# Altium PCB GPS track2_ar.PcbDoc (part 1 of 3)
Units mm, origin at the board's own origin, x right, y up, seen from the top; angles counter-clockwise.
Board outline 100 x 80 mm, 2 copper layers (Top Layer, Bottom Layer); 195 components, 113 nets, 611 pads, 306 vias.
Unrouted connection lines stored in the file: 1.
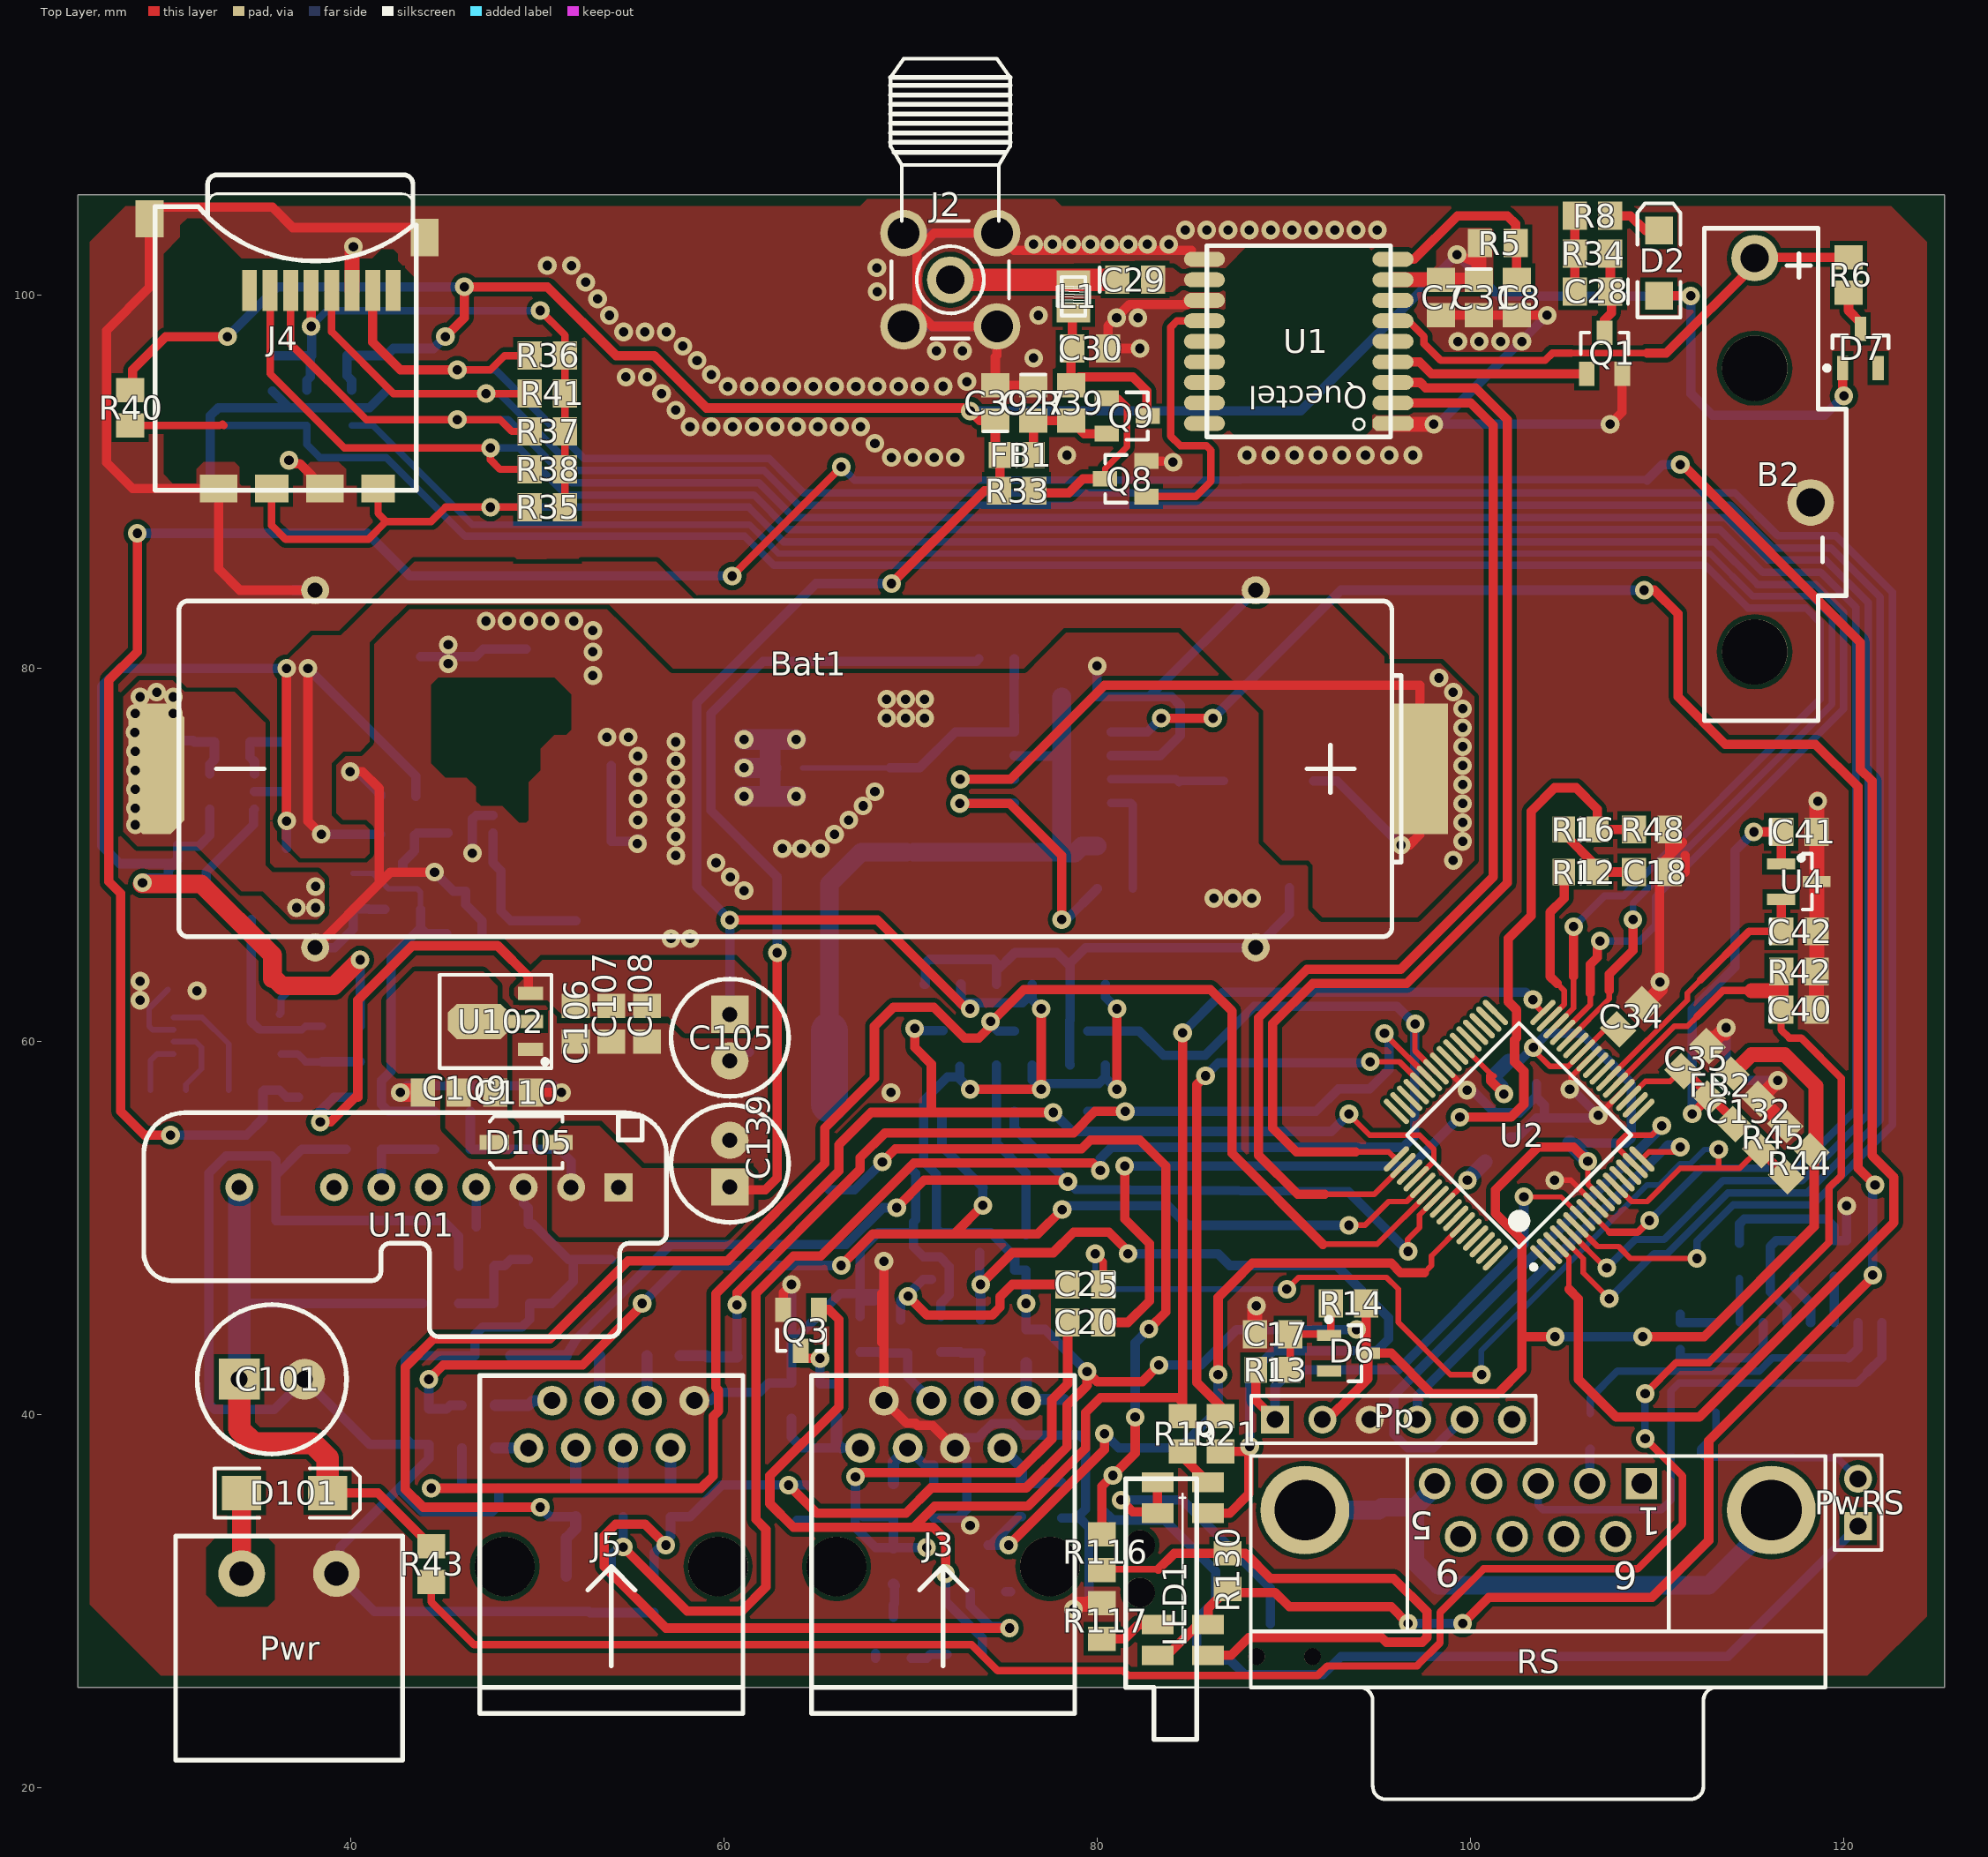
[diagram p0: Top Layer view]
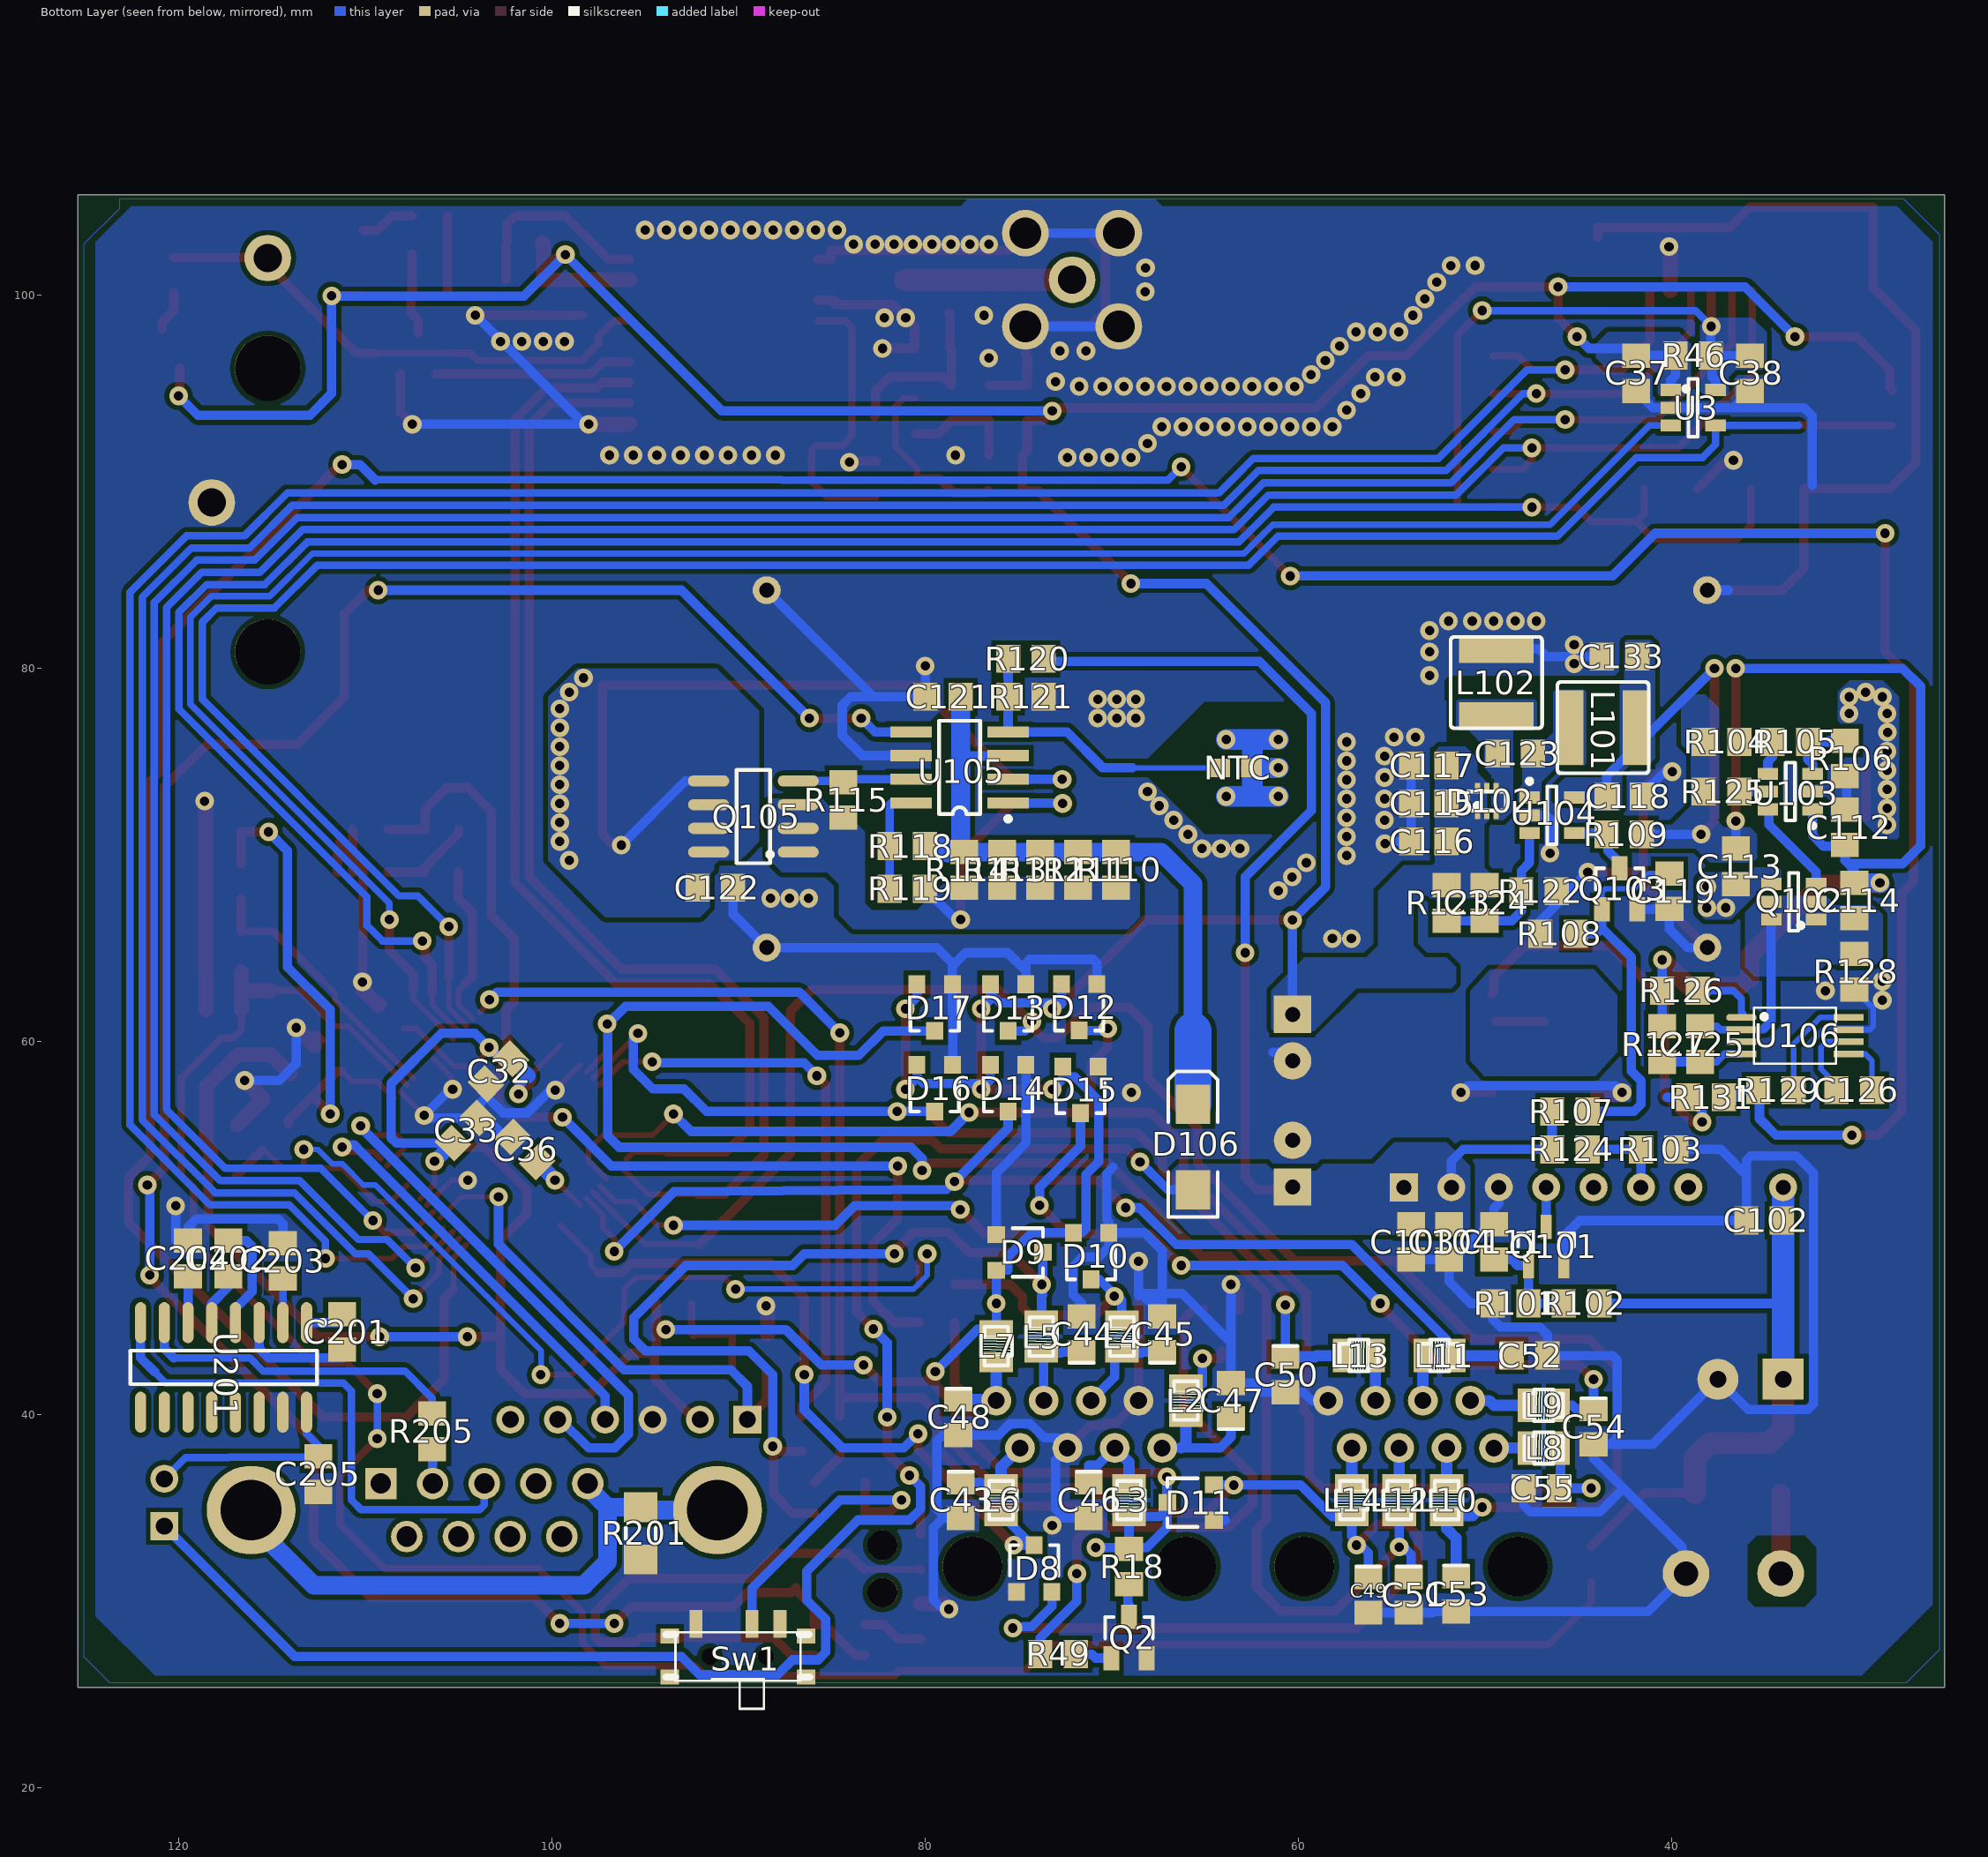
[diagram p1: Bottom Layer view, seen from below]

## Layer stack, top to bottom
Top Layer: signal copper 0.0356
Dielectric: dielectric 0.32, FR-4, Dk 4.8
Bottom Layer: signal copper 0.0356

## Board outline
25.4,25.4 125.4,25.4 125.4,105.4 25.4,105.4

## Design rules (kind name [scope] priority, off if disabled: settings)
Clearance Clearance_1 [All vs (HasFootprint('TQFP-PT64_N'))] p1: gap=0.2
Clearance [All] p2: gap=0.254
ComponentClearance ComponentClearance_1 [All] p1: gap=0.254 collisioncheckmode=3 verticalgap=0.254 showdistances=FALSE
ComponentClearance [All] p2: gap=0.254 collisioncheckmode=3 verticalgap=2540 showdistances=FALSE
FabricationTestPointUsage TestPointUsage [All] p1: valid=0 allowmultiple=FALSE
FabricationTestpoint Testpoint [All] p1: side=3 testpointundercomponent=TRUE minsize=1.016 maxsize=2.54 preferedsize=1.524 minholesize=0 maxholesize=1.016 preferedholesize=0.813 testpointgrid=0.025 allowsidetop=TRUE allowsidebottom=TRUE usegrid=TRUE gridtolerance=0
HoleSize [All] p1: absolutevalues=TRUE maxlimit=5 minlimit=0.254 maxpercent=80.000 minpercent=20.000
MinimumSolderMaskSliver [All] p1: minsoldermaskwidth=0.2
PlaneClearance [All] p1: clearance=0.254
PlaneConnect [All] p1: planeconnectstyle=Direct reliefexpansion=0.508 reliefentries=4 reliefconductorwidth=0.254 reliefairgap=0.254
PolygonConnect [All] p1: connectstyle=Direct reliefconductorwidth=0.254 reliefentries=4 polygonreliefangle="90 Angle"
RoutingVias [All] p1: holewidth=0.5 width=1 viastyle="Through Hole" minholewidth=0.5 minwidth=0.8 maxholewidth=1 maxwidth=1.3
SilkToSilkClearance [All] p1: silktosilkclearance=0.2
SilkscreenOverComponentPads [All] p1: minsilkscreentomaskgap=0.254
SolderMaskExpansion [All] p1: expansion=0.102
Width [All] p1: maxlimit=3 minlimit=0.1 preferedwidth=0.5
19 further rules are at their usual default settings.

## Classes and differential pairs
component class "GPS supply2": Bat1 C101 C102 C103 C104 C105 C106 C107 C108 C109 C110 C111 C112 C113 C114 C115 C116 C117 C118 C119 C121 C122 C123 C124 C125 C126 C132 C133 C139 D101 D102 D105 D106 FB2 L101 L102 NTC Pwr Q101 Q102 Q103 Q105 R101 R102 R103 R104 R105 R106 R107 R108 R109 R110 R111 R112 R113 R114 R115 R116 R117 R118 R119 R120 R121 R122 R123 R124 R125 R126 R127 R128 R129 R130 R131 U101 U102 U103 U104 U105 U106
component class "Tracker RS232_2": C201 C202 C203 C204 C205 PwRS R201 R205 RS U4a U201
component class "GPS track2": B2 C7 C8 C17 C18 C20 C25 C27 C28 C29 C30 C31 C32 C33 C34 C35 C36 C37 C38 C39 C40 C41 C42 C43 C44 C45 C46 C47 C48 C49 C50 C51 C52 C53 C54 C55 D2 D6 D7 D8 D9 D10 D11 D12 D13 D14 D15 D16 D17 FB1 J2 J3 J4 J5 L1 L2 L3 L4 L5 L6 L7 L8 L9 L10 L11 L12 L13 L14 LED1 Pp Q1 Q2 Q3 Q8 Q9 R5 R6 R8 R12 R13 R14 R16 R18 R19 R21 R33 R34 R35 R36 R37 R38 R39 R40 R41 R42 R43 R44 R45 R46 R48 R49 Sw1 U1 U2 U3 U4

## Components (designator, comment, footprint, x,y, rotation, side; value= is the part's Value field where it differs from the comment)
B2 "CR2032 holder" "1065 Keystone" 118.237,88.9 r270 top
Bat1 "LiIon" 18650 63.3,74.625 r180 top locked
C7 "Cap Semi" 2012[0805] 98.425,99.883 r90 top
C8 "Cap Semi" 2012[0805] 102.489,99.883 r90 top
C17 "Cap Semi" 2012[0805] 89.408,44.323 r0 top
C18 "Cap Semi" 2012[0805] 109.728,69.093 r180 top
C20 "Cap Semi" 2012[0805] 79.375,44.958 r0 top
C25 "Cap Semi" C0805 79.375,46.99 r180 top
C27 "Cap Semi" C0805 76.581,94.234 r270 top
C28 "Cap Semi" C0805 106.553,100.203 r180 top
C29 "Cap Semi" C0805 82.042,100.838 r0 top
C30 "Cap Semi" C0805 79.629,97.155 r0 top
C31 "Cap Semi" C0805 100.457,99.883 r270 top
C32 "Cap Semi" 2012[0805] 102.87,58.42 r135 bottom
C33 "Cap Semi" 2012[0805] 104.648,55.245 r315 bottom
C34 "Cap Semi" 2012[0805] 108.585,61.341 r225 top
C35 "" 2012[0805] 112.051,59.092 r225 top
C36 "Cap Semi" 2012[0805] 101.473,54.229 r225 bottom
C37 "Cap Semi" 2012[0805] 41.91,95.824 r90 bottom
C38 "Cap Semi" 2012[0805] 35.814,95.824 r90 bottom
C39 "Cap Semi" C0805 74.549,94.234 r90 top
C40 "Cap Semi" C0805 117.602,61.722 r0 top
C41 "Cap Semi" C0805 117.607,71.247 r0 top
C42 "Cap Semi" C0805 117.607,65.913 r0 top
C43 "Cap Semi" C0805 78.105,35.433 r270 bottom
C44 "Cap Semi" C0805 71.628,44.323 r90 bottom
C45 "Cap Semi" C0805 67.31,44.323 r90 bottom
C46 "Cap Semi" C0805 71.247,35.433 r270 bottom
C47 "Cap Semi" C0805 63.627,40.767 r90 bottom
C48 "Cap Semi" C0805 78.232,39.878 r270 bottom
C49 "Cap Semi" C0805 56.261,30.353 r270 bottom
C50 "Cap Semi" C0805 60.706,42.164 r270 bottom
C51 "Cap Semi" C0805 54.102,30.353 r270 bottom
C52 "Cap Semi" C0805 47.625,43.18 r180 bottom
C53 "Cap Semi" C0805 51.562,30.414 r270 bottom
C54 "Cap Semi" C0805 44.196,39.37 r270 bottom
C55 "Cap Semi" C0805 46.99,36.068 r0 bottom
C101 "220uF 35V" "Cap electrolyt 7" 35.786,41.91 r0 top
C102 "Cap Semi" 2012[0805] 35.052,50.419 r180 bottom
C103 "Cap Semi" 2012[0805] 53.975,49.276 r90 bottom
C104 "Cap Semi" 2012[0805] 51.943,49.276 r90 bottom
C105 "CAP ELECTOLYT" "Cap electrolyt 8" 60.325,60.218 r270 top
C106 "Cap Semi" 2012[0805] 52.07,60.96 r90 top
C107 "Cap Semi" 2012[0805] 53.975,60.96 r90 top
C108 "Cap Semi" 2012[0805] 55.88,60.96 r90 top
C109 "Cap Semi" 2012[0805] 44.831,57.277 r0 top
C110 "Cap Semi" 2012[0805] 48.707,57.277 r180 top
C111 "Cap Semi" 2012[0805] 49.53,49.276 r270 bottom
C112 "Cap Semi" 2012[0805] 30.734,71.501 r270 bottom
C113 "Cap Semi" 2012[0805] 36.576,69.403 r90 bottom
C114 "Cap Semi" 2012[0805] 30.226,67.564 r90 bottom
C115 "Cap Semi" 2012[0805] 53.02,72.771 r180 bottom
C116 "Cap Semi" 2012[0805] 53.02,70.739 r180 bottom
C117 "Cap Semi" 2012[0805] 53.02,74.803 r180 bottom
C118 "Cap Semi" 2012[0805] 42.545,73.152 r0 bottom
C119 "Cap Semi" 2012[0805] 40.132,68.072 r90 bottom
C121 "Cap Semi" 2012[0805] 79.055,78.486 r180 bottom
C122 "Cap Semi" 2012[0805] 91.247,68.26 r0 bottom
C123 "Cap Semi" 2012[0805] 48.387,75.438 r180 bottom
C124 "Cap Semi" 2012[0805] 50.038,67.437 r90 bottom
C125 "Cap Semi" 2012[0805] 38.481,59.878 r270 bottom
C126 "Cap Semi" 2012[0805] 30.226,57.404 r180 bottom
C132 "Cap Semi" 2012[0805] 114.808,56.261 r225 top
C133 "Cap Semi" 2012[0805] 42.799,80.645 r180 bottom
C139 "CAP ELECTOLYT" "Cap electrolyt 8" 60.325,53.467 r90 top
C201 "Cap Semi" 2012[0805] 111.252,44.45 r90 bottom
C202 "Cap Semi" 2012[0805] 117.348,48.387 r90 bottom
C203 "Cap Semi" 2012[0805] 114.427,48.26 r270 bottom
C204 "Cap Semi" 2012[0805] 119.507,48.387 r270 bottom
C205 "Cap Semi" 2012[0805] 112.522,36.83 r90 bottom
D2 "OSTG1206C1A" 3.2X1.6X1.1 110.109,101.727 r90 top
D6 "BAT54" SOT23_N 93.472,43.307 r0 top
D7 "BAT54" SOT23_N 120.904,97.155 r90 top
D8 "BAV99" SOT-23 74.168,31.77 r180 bottom
D9 "BAV99" SOT-23 74.95,48.707 r270 bottom
D10 "BAV99" SOT-23 71.12,48.514 r0 bottom
D11 "BAV99" SOT-23 65.786,35.306 r90 bottom
D12 "BAV99" SOT-23 71.755,61.849 r0 bottom
D13 "BAV99" SOT-23 75.565,61.829 r0 bottom
D14 "BAV99" SOT-23 75.565,57.511 r0 bottom
D15 "BAV99" SOT-23 71.689,57.424 r0 bottom
D16 "BAV99" SOT-23 79.502,57.511 r0 bottom
D17 "BAV99" SOT-23 79.502,61.829 r0 bottom
D101 "1N5819" DO214 36.463,35.814 r0 top
D102 "PMEG1020EV" SOT-666-DIODE 49.911,72.898 r90 bottom
D105 "MBR0520LT1G" SOD-123 49.403,54.61 r180 top
D106 "1N5819" DO214 65.659,54.356 r90 bottom
FB1 "BLM21AG102SN1D" RESC2012N 75.692,91.44 r0 top
FB2 "BLM21AG102SN1D" RESC2012N 113.411,57.658 r45 top
J2 "SMA R/A PCB" "SMA R/A PCB" 72.136,100.838 r270 top locked
J3 "TS8P8C-PCB-UH" TS8P8C-PCB-UH 71.755,31.877 r0 top locked
J4 "microSD Socket" 112A-TAAR-R02 37.846,97.155 r0 top locked
J5 "TS8P8C-PCB-UH" TS8P8C-PCB-UH 53.975,31.877 r0 top
L1 "CCFH 0805 series choke" "CCFH0805 C Series" 78.74,99.949 r90 top
L2 "CCFH 0805 series choke" "CCFH0805 C Series" 66.04,40.767 r270 bottom
L3 "CCFH 0805 series choke" "CCFH0805 C Series" 69.088,35.433 r90 bottom
L4 "CCFH 0805 series choke" "CCFH0805 C Series" 69.469,44.196 r270 bottom
L5 "CCFH 0805 series choke" "CCFH0805 C Series" 73.787,44.196 r270 bottom
L6 "CCFH 0805 series choke" "CCFH0805 C Series" 75.946,35.434 r90 bottom
L7 "CCFH 0805 series choke" "CCFH0805 C Series" 76.2,43.688 r90 bottom
L8 "CCFH 0805 series choke" "CCFH0805 C Series" 46.863,38.227 r0 bottom
L9 "CCFH 0805 series choke" "CCFH0805 C Series" 46.863,40.513 r0 bottom
L10 "CCFH 0805 series choke" "CCFH0805 C Series" 52.07,35.433 r90 bottom
L11 "CCFH 0805 series choke" "CCFH0805 C Series" 52.451,43.18 r0 bottom
L12 "CCFH 0805 series choke" "CCFH0805 C Series" 54.61,35.433 r90 bottom
L13 "CCFH 0805 series choke" "CCFH0805 C Series" 56.769,43.18 r180 bottom
L14 "CCFH 0805 series choke" "CCFH0805 C Series" 57.15,35.433 r90 bottom
L101 "NRS5020T Taiyo-Yuden inductor" NRS5020Txxx 43.688,76.835 r0 bottom
L102 "NRS5020T Taiyo-Yuden inductor" NRS5020Txxx 49.403,79.248 r270 bottom
LED1 "4x LED's" "515-1061F_2x dual LED's" 82.296,33.02 r0 top
NTC "Res2" 1608[0603] 63.373,74.676 r180 bottom
Pp "Header 6" HDR1X6 89.535,39.751 r0 top
Pwr "MSTBA" MSTBA2.5/2-G-5.08 36.703,31.496 r0 top locked
PwRS "Header 2" HDR1X2 120.777,34.036 r90 top
Q1 "My BSS138" SOT-23_my 107.188,96.774 r0 top
Q2 "My BSS138" SOT-23_my 69.088,27.94 r180 bottom
Q3 "My BSS138" SOT-23_my 64.135,44.661 r180 top
Q8 "My BSS138" SOT-23_my 81.661,90.17 r90 top
Q9 "My SOT23 BSS84" SOT-23_my 81.491,93.533 r270 top
Q101 "BC817" SOT23_N 46.736,49.022 r90 bottom
Q102 "TrenchMOS™ ultra low level FET" SOT-23-6-MOSFET 33.471,67.503 r0 bottom
Q103 "My BSS138" SOT-23_my 42.799,68.072 r180 bottom
Q105 "IRF7416" SO-8_N 89.215,72.07 r0 bottom
R5 "Res2" 2012[0805] 101.473,102.804 r180 top
R6 "Res2" 2012[0805] 120.269,101.092 r270 top
R8 "Res2" 2012[0805] 106.553,104.267 r0 top
R12 "Res2" RESC2012N 105.918,69.093 r180 top
R13 "Res2" RESC2012N 89.408,42.418 r180 top
R14 "Res2" 2012[0805] 93.472,45.974 r180 top
R16 "Res2" RESC2012N 105.907,71.374 r180 top
R18 "Res2" 2012[0805] 69.088,31.877 r90 bottom
R19 "Res2" 2012[0805] 84.582,38.989 r270 top
R21 "Res2" 2012[0805] 86.614,38.989 r270 top
R33 "Res2" 2012[0805] 75.692,89.535 r0 top
R34 "Res2" 2012[0805] 106.553,102.235 r0 top
R35 "Res2" 2012[0805] 50.546,88.646 r180 top
R36 "Res2" 2012[0805] 50.546,96.774 r180 top
R37 "Res2" 2012[0805] 50.546,92.71 r180 top
R38 "Res2" 2012[0805] 50.546,90.678 r180 top
R39 "Res2" 2012[0805] 78.613,94.234 r90 top
R40 "Res2" 2012[0805] 28.194,93.98 r270 top
R41 "Res2" 2012[0805] 50.546,94.742 r0 top
R42 "Res2" 2012[0805] 117.602,63.759 r0 top
R43 "Res2" 2012[0805] 44.323,32.004 r270 top
R44 "Res2" 2012[0805] 117.602,53.467 r225 top
R45 "Res2" 2012[0805] 116.205,54.864 r45 top
R46 "Res2" 2012[0805] 38.862,96.774 r180 bottom
R48 "Res2" 2012[0805] 109.728,71.374 r180 top
R49 "Res2" 2012[0805] 72.898,27.178 r0 bottom
R101 "Res2" 2012[0805] 48.641,45.974 r180 bottom
R102 "Res2" 2012[0805] 44.831,45.974 r180 bottom
R103 "Res2" 2012[0805] 40.706,54.229 r0 bottom
R104 "Res2" 2012[0805] 37.338,76.073 r0 bottom
R105 "Res2" 2012[0805] 33.655,76.073 r0 bottom
R106 "Res2" 2012[0805] 30.734,75.184 r90 bottom
R107 "Res2" 2012[0805] 45.466,56.261 r0 bottom
R108 "Res2" 2012[0805] 46.101,65.786 r180 bottom
R109 "Res2" 2012[0805] 42.545,71.12 r180 bottom
R110 "Res2" 2012[0805] 69.784,69.215 r90 bottom
R111 "Res2" 2012[0805] 71.816,69.215 r90 bottom
R112 "Res2" 2012[0805] 73.848,69.215 r90 bottom
R113 "Res2" 2012[0805] 75.88,69.215 r90 bottom
R114 "Res2" 2012[0805] 77.912,69.215 r90 bottom
R115 "Res2" 2012[0805] 84.389,72.959 r90 bottom
R116 "Res2" 2012[0805] 80.264,32.639 r90 top
R117 "Res2" 2012[0805] 80.264,28.956 r270 top
R118 "Res2" 2012[0805] 80.96,70.485 r180 bottom
R119 "Res2" 2012[0805] 80.96,68.199 r180 bottom
R120 "Res2" 2012[0805] 74.615,80.518 r0 bottom
R121 "Res2" 2012[0805] 74.61,78.486 r180 bottom
R122 "Res2" 2012[0805] 47.117,68.072 r180 bottom
R123 "Res2" 2012[0805] 52.07,67.437 r270 bottom
R124 "Res2" 2012[0805] 45.466,54.229 r180 bottom
R125 "Res2" 2012[0805] 37.338,73.406 r180 bottom
R126 "Res2" 2012[0805] 39.563,62.738 r180 bottom
R127 "Res2" 2012[0805] 40.513,59.878 r270 bottom
R128 "WSL0805R0800FEB" 2012[0805] 30.226,63.754 r270 bottom
R129 "Res2" 2012[0805] 34.417,57.404 r0 bottom
R130 "Res2" 2012[0805] 86.995,31.623 r90 top
R131 "Res2" 2012[0805] 38.166,57.023 r0 bottom
R201 "Res2" 3216[1206] 95.25,33.655 r270 bottom
R205 "Res2" 2012[0805] 106.426,39.116 r270 bottom
RS "D Connector 9" DSUB1.385-2H9 103.632,25.4 r180 top locked
Sw1 "SPDT" PCM12SMTR 90.043,27.051 r180 bottom
U1 "L70 Quectel" L70 90.805,97.536 r180 top
U2 "PIC24FJ128GA306-I/PT" TQFP-PT64_N 102.616,54.991 r135 top locked
U3 "IntelliMAX™ Advanced Load Management" SOT23-5AN 38.862,93.98 r180 bottom
U4 "MCP9700AT-E/TT" SOT-23-TT3_N 117.607,68.58 r0 top
U101 "Rohm switching DC/DC regulator" BP502xA 42.926,52.197 r180 top
U102 "MCP1700T-xxxx" SOT89_my 47.879,63.627 r90 top
U103 "2.5?A, 1% Accurate  SOT-23 Comparator and Voltage  Reference for Battery Monitoring" SOT26A-6N 33.655,73.406 r0 bottom
U104 "520kHz Space-Efficient Boost and SEPIC DC-DC  Regulator" SOT23-5AN 46.425,72.136 r180 bottom
U105 "BQ2057CSN" SO8 78.166,74.7 r90 bottom
U106 "1 wire fuel gauge" "TSSOP 8_My" 33.401,60.325 r270 bottom
U201 "MAX3232CSE" NSO16_N 117.602,42.545 r270 bottom

## Footprints (in the part's own frame and the unit in brackets; to place one, negate y for a bottom-side part, rotate by r counter-clockwise, add the part's x,y. Pads: shape width x height; smd on the part's side, far side on the other; paste and mask are expansions set on the pad)
3.2X1.6X1.1 [mm] "SM LED; 2 Flat Leads"
  rect 1.5x1.5 smd: 1(-1.75,0) 2(1.75,0)
  silkscreen extent -2.9,-1.15 3.2,1.15
112A-TAAR-R02 [mm] "Micro SD card connector, Push-Push, Attend Technology"
  rect 0.8x2.2 smd: 1(-3.26,3.1) 2(-2.16,3.1) 3(-1.06,3.1) 4(0.04,3.1) 5(1.14,3.1) 6(2.24,3.1) 7(3.34,3.1) 8(4.44,3.1)
  rect 1.8x1.5 smd: 9(-2.07,-7.5) 9(3.63,-7.5)
  rect 1.5x2 smd: 10(-8.62,6.95) 10(6.13,5.95)
  rect 2x1.5 smd: 10(-4.92,-7.5) 10(0.78,-7.5)
  silkscreen extent -8.32,-7.6 5.68,9.3, body extent -8.13,-8.38 6.47,9.14, height 1.7
"515-1061F_2x dual LED's" [mm] "Optical light pipe bi row, dual color LEDs (like SML020 Rohm)"
  rect 1.7x1.05 smd: 1d(0.95,-4.255) 1u(0.95,3.365) 2d(3.65,-4.255) 2u(3.65,3.365) 3d(0.95,-5.905) 3u(0.95,1.715) 4d(3.65,-5.905) 4u(3.65,1.715)
  round 1.6 hole 1.6 unplated: MHx(0,0) MHy(0,-2.54)
  silkscreen extent -0.76,-10.41 3.05,3.56, body extent -0.76,-10.67 3.87,3.89, height 9.16
"1065 Keystone" [mm] "CR2032 bat holder vertical Keystone 1065 slim line"
  round 2.5 hole 1.5: 1(-13.1,-3) 2(0,0)
  round 3.5 hole 3.5 unplated: MH1(-7.2,-3) MH2(8,-3)
  silkscreen extent -14.7,-5.7 11.7,1.9, body extent -14.7,-5.7 11.7,1.9, height 25.4
1608[0603] [mm] "Chip Resistor; Body 1.6 x 0.8 mm (LxW typ)"
  rect 1.1x1 smd: 1(-0.85,0) 2(0.85,0)
2012[0805] [mm] "Chip Resistor; Body 2.0 x 1.3 mm (LxW typ)"
  rect 1.3x1.5 smd: 1(-0.95,0) 2(0.95,0)
3216[1206] [mm] "Chip Resistor; Body 3.2 x 1.6 mm (LxW typ)"
  rect 1.6x1.8 smd: 1(-1.4,0) 2(1.4,0)
  silkscreen extent -0.3,-0.8 0.3,0.8
18650 [mm] "LiIon battery 18650"
  rect 3x7 smd: 1(-34,0)
  oct 3x7 smd: 2(33.7,0)
  round 1.5 hole 0.8: MH(-25.2,-9.576) MH(-25.2,9.576) MH(25.2,-9.576) MH(25.2,9.576)
  silkscreen extent -33,-9 32.5,9, body extent -32.51,-9.13 32.63,9.13, height 18
BP502xA [mm] "DC/DC converter Rohm step-down"
  rect 1.5x1.5 hole 0.8: 1(-11.43,0)
  round 1.5 hole 0.8: 2(-8.89,0) 3(-6.35,0) 4(-3.81,0) 5(-1.27,0) 6(1.27,0) 7(3.81,0) 9(8.89,0)
  silkscreen extent -14,-4 14,8, body extent -14.01,-4.01 14.01,8.01, height 19.5
C0805 [mm] "Chip Capacitor; Body 2.0 x 1.2 mm (LxW typ)"
  rect 1.3x1.5 smd: 1(-0.95,0) 2(0.95,0)
  silkscreen extent -1.52,-0.64 -1.52,0.63
"Cap electrolyt 7" [mm] "DxH 8x12mm RM3.5"
  rect 2.2x2.2 hole 0.9: 1(-1.75,0)
  round 2.2 hole 0.9: 2(1.75,0)
  silkscreen extent -4,-4 4,4, body extent -4,-4 4,4, height 12
"Cap electrolyt 8" [mm] "DxH 6.3x11mm RM2.5"
  rect 2x2 hole 0.8: 1(-1.25,0)
  round 2 hole 0.8: 2(1.25,0)
  silkscreen extent -3.15,-3.15 3.15,3.15, body extent -3.15,-3.15 3.15,3.15, height 11
"CCFH0805 C Series" [mm] "CCFH0805 C Series INDUCTOR 0805 Coils"
  rect 1.02x1.8 smd: 1(-0.89,0) 2(0.89,0)
  silkscreen extent -1.03,-0.87 1.03,0.87, body extent -1.5,-1 1.5,1, height 1.5
DO214 [mm] "DO-214-AC/SMA; 2 C-Bend Leads; Body 5.3 x 2.6 mm, inc. leads (LxW)"
  rect 2.1x1.85 smd: 1(-2.3,0) 2(2.3,0)
  silkscreen extent -3.75,-1.33 4.05,1.33
DSUB1.385-2H9 [mm] "Connector; D Subminiature; 9 Position; Right Angle; Pitch 1.385 mm"
  rect 1.69x1.69 hole 1.09: 1(-5.54,-10.92)
  round 1.69 hole 1.09: 2(-2.77,-10.92) 3(0,-10.92) 4(2.77,-10.92) 5(5.54,-10.92) 6(-4.155,-8.08) 7(-1.385,-8.08) 8(1.385,-8.08) 9(4.155,-8.08)
  round 4.76 hole 3.26: 10(-12.495,-9.5) 11(12.495,-9.5)
  silkscreen extent -15.4,-12.4 15.4,6
HDR1X2 [mm] "Connector; Header; 2 Position"
  rect 1.5x1.5 hole 0.9: 1(0,0)
  round 1.5 hole 0.9: 2(2.54,0)
  silkscreen extent -1.27,-1.27 3.81,1.27
HDR1X6 [mm] "Connector; Header; 6 Position"
  rect 1.5x1.5 hole 0.9: 1(0,0)
  round 1.5 hole 0.9: 2(2.54,0) 3(5.08,0) 4(7.62,0) 5(10.16,0) 6(12.7,0)
  silkscreen extent -1.27,-1.27 13.97,1.27
L70 [mm] "Compact GPS Module  with Super Sensitivity Quectel"
  oct 2.2x0.8 smd: 1(-5.05,4.4)
  oval 2.2x0.8 smd: 2(-5.05,3.3) 3(-5.05,2.2) 4(-5.05,1.1) 5(-5.05,0) 6(-5.05,-1.1) 7(-5.05,-2.2) 8(-5.05,-3.3) 9(-5.05,-4.4) 10(5.05,-4.4) 11(5.05,-3.3) 12(5.05,-2.2) 13(5.05,-1.1) 14(5.05,0) 15(5.05,1.1) 16(5.05,2.2) 17(5.05,3.3) 18(5.05,4.4)
  silkscreen extent -4.93,-5.13 4.93,5.13, body extent -4.92,-5.12 4.92,5.12, height 2.5
MSTBA2.5/2-G-5.08 [mm] "Phoenix contact 2 terminal PCB connector"
  round 2.5 hole 1.3: 1(-2.54,0) 2(2.54,0)
  silkscreen extent -6.08,-10 6.08,2, body extent -6.08,-10 6.08,2, height 8.6
NRS5020Txxx [mm] "NRS5020T series Taiyo-Yuden"
  rect 1.5x4 smd: 1(-1.8,0) 2(1.8,0)
  silkscreen extent -2.45,-2.45 2.45,2.45
NSO16_N [mm] "SOIC, 16-Leads, Body 9.9x3.9mm, Pitch 1.27mm, IPC Medium Density"
  oval 2.2x0.6 smd: 1(-2.4,4.445) 2(-2.4,3.175) 3(-2.4,1.905) 4(-2.4,0.635) 5(-2.4,-0.635) 6(-2.4,-1.905) 7(-2.4,-3.175) 8(-2.4,-4.445) 9(2.4,-4.445) 10(2.4,-3.175) 11(2.4,-1.905) 12(2.4,-0.635) 13(2.4,0.635) 14(2.4,1.905) 15(2.4,3.175) 16(2.4,4.445)
  silkscreen extent -2.52,-5 0.9,5.42, body extent -2,-5 2,5, height 1.75
PCM12SMTR [mm] "Ultraminiature Surface Mount Slide Switch"
  rect 0.7x1.5 smd: 1(-2.25,1.75) 2(0.75,1.75) 3(2.25,1.75)
  rect 1x0.8 smd: MH(-3.65,-1.1) MH(-3.65,1.1) MH(3.65,-1.1) MH(3.65,1.1)
  round 0.9 hole 0.9 unplated: ""(-1.5,0) ""(1.5,0)
  silkscreen extent -3.85,-2.8 3.85,1.3, body extent -3.3,-2.8 3.3,1.27, height 1.4
RESC2012N [mm] "Chip Resistor, Body 2.0x1.2mm, IPC Medium Density"
  rect 1.2x1.4 smd: 1(-0.9,0) 2(0.9,0)
  silkscreen extent 0,-0.6 0,0.6, body extent -1.07,-0.7 1.07,0.7, height 0.7
"SMA R/A PCB" [mm] "Right angle SMA female PCB connector"
  round 2.5 hole 1.5: 1(0,0)
  round 2.5 hole 1.7: 2(-2.5,2.5) 2(-2.5,-2.5) 2(2.5,2.5) 2(2.5,-2.5)
  silkscreen extent -11.85,-3.2 3.15,3.2, body extent -11.65,-3.16 3.15,3.17, height 9.62
SO8 [mm] "Small Outline; 8 Leads; Body Width 3.9 mm; Pitch 1.27 mm"
  rect 0.6x2.2 smd: 1(-1.905,-2.6) 2(-0.635,-2.6) 3(0.635,-2.6) 4(1.905,-2.6) 5(1.905,2.6) 6(0.635,2.6) 7(-0.635,2.6) 8(-1.905,2.6)
  silkscreen extent -2.88,-2.72 2.5,1.1
SO-8_N [mm] "SOIC, 8-Leads, Body 4.9x3.9mm, Pitch 1.27mm, IPC Medium Density"
  oval 2.2x0.6 smd: 1(-2.4,1.905) 2(-2.4,0.635) 3(-2.4,-0.635) 4(-2.4,-1.905) 5(2.4,-1.905) 6(2.4,-0.635) 7(2.4,0.635) 8(2.4,1.905)
  silkscreen extent -1.01,-2.5 0.9,2.5, body extent -1.95,-2.45 1.95,2.45, height 1.75
SOD-123 [mm] "SOD-123; 2 Leads; Body 2.7 x 1.6 mm, (LxW)"
  rect 1.6x0.8 smd: 1(-1.7,0) 2(1.7,0)
  silkscreen extent -1.95,-1.4 1.95,1.4
SOT23-5AN [mm] "SOT23, 5-Leads, Body 2.9x1.6mm, Pitch 0.95mm, Lead Span 2.8mm, IPC Medium Density"
  rect 1.1x0.65 smd: 1(-1.2,0.95) 2(-1.2,0) 3(-1.2,-0.95) 4(1.2,-0.95) 5(1.2,0.95)
  silkscreen extent -0.5,-1.55 0.25,1.55, body extent -0.9,-1.55 0.9,1.55, height 1.45
SOT23_N [mm] "SOT23, 3-Leads, Body 2.9x1.3mm, Pitch 0.95mm, Lead Span 2.3mm, IPC Medium Density"
  rect 1.3x0.6 smd: 1(-1.05,0.95) 2(-1.05,-0.95) 3(1.05,0)
  silkscreen extent -1.17,-1.5 0.7,1.92, body extent -0.7,-1.5 0.7,1.5, height 1.1
SOT26A-6N [mm] "SOT23, 6-Leads, Body 2.9x1.6mm, Pitch 0.95mm, Lead Span 2.7mm, IPC Medium Density"
  rect 1.1x0.65 smd: 1(-1.2,0.95) 2(-1.2,0) 3(-1.2,-0.95) 4(1.2,-0.95) 5(1.2,0) 6(1.2,0.95)
  silkscreen extent -1.32,-1.55 0.25,1.95, body extent -0.9,-1.55 0.9,1.55, height 1.45
SOT89_my [mm] "any SOT89"
  rect 0.7x1.35 smd: 1(-4.04,-1.769) 3(-1.04,-1.769)
  rect 0.7x1.8 smd: 2(-2.54,-1.544)
  oct 1.9x3.3 smd: 2(-2.54,1.006)
  silkscreen extent -5.04,-2.89 -0.04,3.11
SOT-23 [mm] "SOT-23; 3 Leads; Body 3.0 x 2.6 mm, inc. leads (LxW max)"
  rect 0.9x0.95 smd: 1(-0.95,-1.25) 2(0.95,-1.25) 3(0,1.25)
  silkscreen extent -1.3,-0.37 1.3,1.25
SOT-23-6-MOSFET [mm] "SOT457"
  rect 1.1x0.65 smd: 1(-1.2,0) 1(-1.2,0.95) 1(1.2,0) 1(1.2,0.95) 2(-1.2,-0.95) 3(1.2,-0.95)
  silkscreen extent -0.5,-1.55 0.25,1.55, body extent -0.9,-1.55 0.9,1.55, height 1.45
SOT-23-TT3_N [mm] "SOT23, 3-Leads, Body 2.9x1.3mm, Pitch 0.95mm, Lead Span 2.4mm, IPC Medium Density"
  rect 1.5x0.6 smd: 1(-0.95,0.95) 2(-0.95,-0.95) 3(0.95,0)
  silkscreen extent 0,-1.5 0.7,1.5, body extent -0.7,-1.5 0.7,1.5, height 1.12
SOT-23_my [mm]
  rect 0.85x1.3 smd: 1(-0.95,-0.973) 2(0.95,-0.973) 3(0,1.227)
  silkscreen extent -1.27,0.08 1.27,1.23, body extent -1.52,-1.14 1.48,1.5, height 1.08
SOT-666-DIODE [mm] "SOT666 - NXP"
  rect 0.45x0.28 smd: 1(-0.75,-0.5) 1(0.75,-0.5) 2(-0.75,0) 2(-0.75,0.5) 2(0.75,0) 2(0.75,0.5)
  silkscreen extent -0.51,-1.02 0.51,1.02, body extent -0.64,-0.76 0.64,0.76, height 1.45
TQFP-PT64_N [mm] "Thin QFP, 64-Leads, Body 10x10mm, Pitch 0.5mm, IPC Medium Density"
  oval 1.8x0.3 smd: 1(-5.55,3.75) 2(-5.55,3.25) 3(-5.55,2.75) 4(-5.55,2.25) 5(-5.55,1.75) 6(-5.55,1.25) 7(-5.55,0.75) 8(-5.55,0.25) 9(-5.55,-0.25) 10(-5.55,-0.75) 11(-5.55,-1.25) 12(-5.55,-1.75) 13(-5.55,-2.25) 14(-5.55,-2.75) 15(-5.55,-3.25) 16(-5.55,-3.75) 33(5.55,-3.75) 34(5.55,-3.25) 35(5.55,-2.75) 36(5.55,-2.25) 37(5.55,-1.75) 38(5.55,-1.25) 39(5.55,-0.75) 40(5.55,-0.25) 41(5.55,0.25) 42(5.55,0.75) 43(5.55,1.25) 44(5.55,1.75) 45(5.55,2.25) 46(5.55,2.75) 47(5.55,3.25) 48(5.55,3.75)
  oval 0.3x1.8 smd: 17(-3.75,-5.55) 18(-3.25,-5.55) 19(-2.75,-5.55) 20(-2.25,-5.55) 21(-1.75,-5.55) 22(-1.25,-5.55) 23(-0.75,-5.55) 24(-0.25,-5.55) 25(0.25,-5.55) 26(0.75,-5.55) 27(1.25,-5.55) 28(1.75,-5.55) 29(2.25,-5.55) 30(2.75,-5.55) 31(3.25,-5.55) 32(3.75,-5.55) 49(3.75,5.55) 50(3.25,5.55) 51(2.75,5.55) 52(2.25,5.55) 53(1.75,5.55) 54(1.25,5.55) 55(0.75,5.55) 56(0.25,5.55) 57(-0.25,5.55) 58(-0.75,5.55) 59(-1.25,5.55) 60(-1.75,5.55) 61(-2.25,5.55) 62(-2.75,5.55) 63(-3.25,5.55) 64(-3.75,5.55)
  silkscreen extent -5.67,-4.25 4.25,4.57, body extent -5,-5 5,5, height 1.2
TS8P8C-PCB-UH [mm] "Cvilux CJ3188A1100, Comet TS8P8C-PCB-UH"
  round 1.6 hole 0.9: 1(-4.445,6.35) 2(-3.175,8.89) 3(-1.905,6.35) 4(-0.635,8.89) 5(0.635,6.35) 6(1.905,8.89) 7(3.175,6.35) 8(4.445,8.89)
  round 3.2 hole 3.2 unplated: MH(-5.715,0) MH(5.715,0)
  silkscreen extent -7.05,-7.87 7.05,10.23, body extent -7.18,-8 7.18,10.36, height 12.6
"TSSOP 8_My" [mm] "TSSOP 4.40mm body, pitch 0.65mm"
  oct 0.35x1.6 smd: 1(-0.975,-2.875)
  rect 0.35x1.6 smd: 2(-0.325,-2.875) 3(0.325,-2.875) 4(0.975,-2.875) 5(0.975,2.875) 6(0.325,2.875) 7(-0.325,2.875) 8(-0.975,2.875)
  silkscreen extent -1.5,-2.2 1.5,2.2, body extent -1.5,-3.23 1.5,3.23, height 1.2

## Part data
B2: library part CR2032_holder
Bat1: "18650 cell"
C7 C17 C18 C20 C25 C27 C28 C29 C30 C31 C32 C33 C34 C36 C37 C38 C39 C40 C41 C42 C43 C44 C45 C46 C47 C48 C49 C50 C51 C52 C53 C54 C55 C102 C103 C104 C106 C107 C108 C109 C110 C111 C112 C113 C114 C115 C116 C117 C118 C119 C121 C122 C123 C124 C125 C126 C132 C133 C201 C202 C203 C204 C205: "Capacitor (Semiconductor SIM Model)"
C35: library part "Cap Semi", "Capacitor (Semiconductor SIM Model)"
C101: library part "CAP ELECTOLYT", "Polarized Capacitor (TH)"
C105 C139: "Polarized Capacitor (TH)"
D2: library part HSMM-C150, "High Performance SMT Chip LED, Green"
D6 D7: "Schottky Barrier Diode"
D8 D9 D10 D11 D12 D13 D14 D15 D16 D17: "Silicon Switching Diode Array for High-Speed Switching"
D101 D106: library part BZG05C4V7, "Silicon Zener Diode (3W)"
D102: "Ultra low VF MEGA Schottky barrier  rectifier"
D105: "Surface Mount  Schottky Power Rectifier"
FB1 FB2: library part "Inductor Isolated", "Isolated Inductor"
J4: library part "Micro SD Socket PP T1"
L1 L2 L3 L4 L5 L6 L7 L8 L9 L10 L11 L12 L13 L14: library part "CCFH0805 coil Coils"
LED1: library part "515-1061F_2x dual LED's"
NTC R5 R6 R8 R12 R13 R14 R16 R18 R19 R21 R33 R34 R35 R36 R37 R38 R39 R40 R41 R42 R43 R44 R45 R46 R48 R49 R101 R102 R103 R104 R105 R106 R107 R108 R109 R110 R111 R112 R113 R114 R115 R116 R117 R118 R119 R120 R121 R122 R123 R124 R125 R126 R127 R129 R130 R131 R201 R205: "Resistor"
Pp: "Header, 6-Pin"
Pwr: library part "TS-501 2P", "Header, 2-Pin"
PwRS: "Header, 2-Pin"
Q1 Q2 Q3 Q8 Q103: library part BSS138_my
Q9: library part BSS84_my
Q101: "NPN General-purpose Transistor"
Q102: library part PMN27UN, "TrenchMOS™ ultra low level FET SOT-457"
Q105: "HEXFET Power MOSFET"
R128: library part Res2, "Resistor"
RS: "Receptacle Assembly, 9 Position, Right Angle"
Sw1: library part PCM12SMTR, "Ultraminiature Surface Mount Slide Switch"
U2: library part PIC24FJ128GA106-I/PT, "General Purpose 16-Bit Flash Microcontroller, 128KB Flash, 16KB SRAM, 64-Pin TQFP, Industrial Temperature"
U3: library part FPF2116, "Load Switch, current limited, status output"
U4: "Low-Power Linear Active Thermistor IC, 3-Pin SOT-23, Extended Temperature, Tape and Reel"
U101: library part BP502x_Rohm
U103: library part LTC1998
U104: library part LM2735YMF
U105: "Advanced charge controller IC"
U106: library part DS2756+, "high-precision battery fuel gauge"
U201: "3.0V TO 5.5V, Low-Power, up to 1Mbps, True RS-232 Transceiver Using Four 0.1µF External Capacitor"

## Via types
v1: diameter 1, hole 0.5, Top Layer to Bottom Layer, 306 vias

## Nets (pads, with @x,y where several pads share a name; then routed paths per layer and width w, separated by ;. In a path a pad name is that pad's centre, name@x,y a point inside that pad or via, vN(x,y) a via of type N, cw(c..) or ccw(c..) an arc to the next point about the centre after c; other vN are vias at no path point)
1_WIRE: R129.2 R131.1 U2.3 | length 205.7
  Top Layer w0.3: U2.3@104.596,49.122 105.283,48.435 105.283,46.736
  Top Layer w0.4: v1@60.221,84.958 v1(60.447,84.958) v1(66.294,90.805)
  Top Layer w0.5: v1(28.575,87.249) 28.575,80.899 27.051,79.375 27.051,68.58 27.686,67.945 27.686,56.261 28.956,54.991 v1(30.353,54.991) ; 105.283,46.736 105.791,46.228 105.791,41.91 107.823,39.878 112.268,39.878 122.693,50.303 122.693,52.735 121.531,53.896 121.531,73.972 120.904,74.599 120.904,81.407 111.379,90.932 v1(111.252,90.932)
  Bottom Layer w0.4: v1(66.294,90.805) 66.994,90.105 87.681,90.105 87.688,90.112 109.474,90.112
  Bottom Layer w0.5: v1(28.575,87.249) 40.894,87.249 43.18,84.963 v1@60.071,84.963 ; v1(30.353,54.991) 34.417,54.991 35.306,55.88 35.306,57.343 R129.2@35.367,57.404 36.195,57.404 36.576,57.023 R131.1@37.216,57.023 ; 109.474,90.112 110.294,90.932 v1(111.252,90.932)
1PPS: Q1.1 U1.4 | length 10.6
  Top Layer w0.5: U1.4@95.855,96.436 97.279,96.436 97.914,95.801 Q1.1@106.238,95.801
+3V3: C7.2 C31.1 C32.2 C33.2 C34.2 C37.2 C39.1 C49.1 C105.1 C106.2 C107.2 C108.2 C115.2 C116.2 C117.2 C124.2 D2.1 D6.3 D7.1 D8.2 D9.2 D10.2 D11.2 D12.2 D13.2 D14.2 D15.2 D16.2 D17.2 D102.2 FB1.1 FB2.2 L7.2 L14.1 Pp.2 R5.2 R14.1 R33.1 R40.1 R44.1 R46.1 R123.1 R131.2 U1.8 U2.10 U2.26 U2.38 U3.1 U102.3 | length 443
  Top Layer w0.3: U2.38@99.575,59.799 101.092,58.283 101.092,58.166 101.272,58.166 ; v1@103.378,59.563 104.267,58.674 105.238,58.674 U2.26@106.01,59.446 107.27,60.706 107.913,60.706 C34.2@107.913,60.669 ; v1(106.299,53.594) 106.299,52.369 U2.10@107.071,51.597
  Top Layer w0.5: R40.1@28.194,94.93 28.321,95.057 28.321,96.012 30.099,97.79 v1(33.401,97.79) ; v1(38.379,55.702) 38.938,55.702 40.259,57.023 ; v1(45.085,97.79) 46.101,98.806 v1(46.101,100.457) 50.546,100.457 54.229,96.774 56.261,96.774 59.072,93.963 73.042,93.963 v1(73.203,93.802) 73.721,93.284 C39.1@74.549,93.284 ; v1(56.896,33.02) 55.778,34.138 54.204,34.138 53.594,33.528 53.594,31.877 56.896,28.575 75.006,28.575 75.159,28.727 v1(75.311,28.575) ; v1(60.325,66.523) 60.33,66.528 68.219,66.528 v1@73.088,61.658 ; v1(63.475,36.235) 64.975,34.735 69.76,34.735 71.119,36.093 76.205,36.093 78.398,38.287 78.398,40.514 79.465,41.58 v1(79.465,42.328) 80.01,41.783 82.423,41.783 v1(83.312,42.672) ; v1(68.986,84.557) 73.965,89.535 R33.1@74.742,89.535 ; v1(73.197,57.449) v1(77.007,57.449) v1(77.007,61.767) ; v1(81.071,57.449) v1(81.071,61.767) ; Pp.2@92.075,39.751 92.329,39.751 93.726,41.148 94.522,41.944 D6.3@94.522,43.307 ; R14.1@94.422,45.974 R14.1@94.422,45.872 ; R14.1@94.522,45.872 R14.1@94.422,45.872 ; v1(99.289,102.184) 100.124,101.839 100.457,101.702 C31.1@100.457,100.833 ; 101.092,58.166 101.092,57.912 v1(101.803,57.201) ; v1(104.544,44.191) 102.763,44.191 102.758,44.196 ; v1(106.299,53.594) 105.537,54.356 103.632,54.356 101.346,52.07 101.346,50.8 102.758,49.388 102.758,44.196 ; v1@109.22,44.196 112.522,44.196 118.424,50.098 118.424,53.988 R44.1@118.274,54.139 ; D2.1@110.109,99.977 111.407,99.977 111.808,99.977 v1(111.811,99.974) ; D7.1@119.954,96.105 119.954,94.676 v1(120.015,94.615) ; R14.1@94.422,45.872 94.422,43.407 D6.3@94.522,43.307 ; D6.3@94.522,43.307 95.758,43.307 97.917,41.148 101.473,41.148 102.758,42.433 102.758,44.196
  Top Layer w0.508: 40.259,57.023 40.386,57.023 40.386,62.23 43.307,65.151 47.879,65.151 49.53,63.5 49.53,62.705 U102.3@49.648,62.587 ; C39.1@74.549,93.284 74.549,91.683 FB1.1@74.792,91.44 74.792,89.585 R33.1@74.742,89.535
  Top Layer w0.8: U1.8@95.855,100.836 98.422,100.836 C7.2@98.425,100.833 C31.1@100.457,100.833 100.457,102.738 R5.2@100.523,102.804 ; FB2.2@114.047,58.294 115.062,59.309 116.84,59.309 118.521,57.628 118.521,54.386 R44.1@118.274,54.139
  Bottom Layer w0.5: v1(33.401,97.79) 36.068,100.457 v1(46.101,100.457) ; v1(38.379,55.702) 38.379,56.286 R131.2@39.116,57.023 ; C37.2@41.91,96.774 42.291,97.155 44.45,97.155 v1(45.085,97.79) ; C49.1@56.261,31.303 56.261,32.614 v1@56.782,33.134 ; 57.15,33.503 L14.1@57.15,34.543 58.19,34.543 59.903,36.256 D11.2@64.536,36.256 ; C105.1@60.325,61.468 v1(60.325,66.523) 58.547,68.301 58.547,78.156 64.948,84.557 v1(68.986,84.557) ; D12.2@72.705,63.099 72.705,62.258 ; 72.72,62.027 72.705,62.042 72.705,62.078 ; v1(73.197,57.449) 72.639,58.006 D15.2@72.639,58.674 72.639,58.115 71.984,58.115 70.714,56.845 70.714,53.569 71.394,52.888 71.394,49.987 71.617,49.764 D10.2@72.07,49.764 74.293,49.764 75.59,48.466 75.59,47.757 D9.2@76.2,47.757 v1(76.2,45.974) L7.2@76.2,44.578 77.215,44.578 v1(79.465,42.328) ; v1(73.197,61.767) 72.705,62.258 ; v1(73.203,93.802) 90.907,93.802 v1(99.289,102.184) 101.524,99.949 v1@111.811,99.949 ; D8.2@73.218,30.52 73.218,29.738 74.305,28.651 74.778,28.651 ; v1(77.007,57.449) 76.515,57.94 D14.2@76.515,58.761 76.515,58.054 76.81,57.76 80.096,57.76 80.452,58.115 D16.2@80.452,58.761 80.452,58.067 v1(81.071,57.449) ; v1(77.007,61.767) 76.515,62.258 D13.2@76.515,63.079 76.515,62.586 76.007,62.078 74.724,62.078 74.711,62.091 72.718,62.091 72.705,62.078 ; D17.2@80.452,63.079 80.452,62.385 v1(81.071,61.767) ; v1(83.312,42.672) 85.575,42.672 87.48,44.577 v1(93.904,44.577) ; 101.272,58.166 101.803,57.635 v1(101.803,57.201) ; C32.2@102.071,58.965 C32.2@102.198,58.965 ; C32.2@102.198,59.092 C32.2@102.198,58.965 ; v1@104.389,44.191 v1(104.544,44.191) v1(109.243,44.191) ; C33.2@105.32,54.573 108.348,54.573 108.636,54.861 108.636,57.746 105.929,60.452 104.14,60.452 v1(103.378,59.69) 102.653,58.965 C32.2@102.198,58.965 ; v1(111.811,99.974) v1@111.811,99.949 ; v1(120.015,94.615) 118.974,93.574 112.979,93.574 111.811,94.742 v1@111.811,99.949 ; 72.705,62.078 72.705,62.258
  Bottom Layer w0.508: R131.2@39.116,57.023 40.259,57.023 ; U3.1@40.062,94.93 40.062,95.447 39.812,95.697 R46.1@39.812,96.774 C37.2@41.91,96.774
  Bottom Layer w0.8: 101.272,58.166 C32.2@102.071,58.965 ; C33.2@105.32,54.573 v1(106.299,53.594)
+3V3ANA: C35.2 C41.1 C132.2 FB2.1 U2.19 U4.1 | length 28.5
  Top Layer w0.3: U2.19@108.485,56.971 109.389,57.875 110.707,57.875 C35.2@111.252,58.42
  Top Layer w0.5: C35.2@111.252,58.42 C35.2@111.379,58.42 111.506,58.42 112.522,57.404 112.775,57.151 FB2.1@112.775,57.022 ; v1(111.887,56.134) FB2.1@112.775,57.022 ; C132.2@114.136,55.589 114.136,55.79 112.903,57.023 112.902,57.022 FB2.1@112.775,57.022 ; v1(115.189,71.247) C41.1@116.657,71.247 U4.1@116.657,69.53
  Bottom Layer w0.5: v1(111.887,56.134) 111.887,61.722 114.173,64.008 114.173,70.231 v1(115.189,71.247)
+4.5V: C103.2 C104.2 C139.1 D105.1 D106.1 PwRS.1 R107.2 R116.2 R120.1 R124.1 U101.1 U101.2 | length 148.3
  Top Layer w0.5: C139.1@60.325,52.217 60.486,52.056 62.216,52.056 62.865,52.705 v1(62.865,64.77) ; v1(68.498,53.557) 69.201,54.26 79.163,54.26 79.641,54.737 82.296,54.737 83.693,53.34 83.693,45.517 v1(82.779,44.602) ; R116.2@80.264,33.589 80.264,36.17 v1(80.848,36.754) 82.042,37.948 v1(82.042,39.878)
  Bottom Layer w0.5: R107.2@46.416,56.261 R124.1@46.416,54.229 51.181,54.229 51.816,53.594 U101.2@51.816,52.197 ; v1(62.865,64.77) 62.865,68.834 59.309,72.39 59.309,77.597 62.103,80.391 73.538,80.391 R120.1@73.665,80.518 ; D106.1@65.659,52.056 66.997,52.056 v1(68.498,53.557) ; v1(80.848,36.754) 80.264,36.17 80.264,34.95 80.848,34.366 83.617,34.366 86.36,31.623 86.36,30.074 85.344,29.058 85.344,27.28 85.75,26.873 87.122,26.873 87.909,26.086 92.1,26.086 93.066,27.051 113.792,27.051 PwRS.1@120.777,34.036 ; v1(82.042,39.878) 82.042,43.866 v1(82.779,44.602)
+13V_EXT: C101.1 C102.2 D101.2 R43.1 R102.2 U101.9 | length 38.6
  Top Layer w0.5: D101.2@38.763,35.814 41.463,35.814 R43.1@44.323,32.954
  Top Layer w1.2: C101.1@34.036,41.91 34.036,39.243 34.798,38.481 37.973,38.481 38.763,37.691 D101.2@38.763,35.814
  Bottom Layer w0.5: 34.036,46.101 34.163,45.974 R102.2@43.881,45.974 ; U101.9@34.036,52.197 34.036,51.323 34.102,51.257 C102.2@34.102,50.419
  Bottom Layer w1.2: C101.1@34.036,41.91 34.036,46.101 34.036,50.419 U101.9@34.036,52.197
+LI: Bat1.1 C112.2 C113.2 C114.2 C118.2 C122.2 C133.2 L101.1 Q105.5 Q105.6 Q105.7 Q105.8 R104.2 R109.2 R125.1 R126.1 R127.1 U103.1 U104.5 U105.2 | length 126.3
  Top Layer w0.5: v1(36.576,71.831) v1(36.576,80.01) ; v1(37.719,80.01) 37.719,71.831 v1(38.43,71.12) ; v1(72.669,74.066) 75.362,74.066 80.396,79.101 97.295,79.101 97.3,79.096 Bat1.1@97.3,74.625 97.3,71.113 96.723,70.536 v1(96.291,70.536)
  Top Layer w1: v1@28.89,68.514 28.829,68.453 32.004,68.453 35.814,64.643 35.814,63.373 35.941,63.373 36.322,62.992 39.116,62.992 v1(40.513,64.389)
  Bottom Layer w0.5: C114.2@30.226,68.514 30.226,69.215 30.734,69.723 C112.2@30.734,70.419 ; U103.1@32.455,72.456 32.455,71.063 31.877,70.485 C112.2@30.8,70.485 ; C113.2@36.576,70.353 v1(36.576,71.831) ; v1(36.576,80.01) 27.635,80.01 26.67,79.045 26.67,70.51 27.635,69.545 30.48,69.545 30.734,69.799 C112.2@30.734,70.419 ; v1(37.719,80.01) 41.391,76.338 43.495,74.234 C118.2@43.495,73.152 ; v1(38.43,71.12) R109.2@41.595,71.12 ; R127.1@40.513,60.828 R126.1@40.513,62.738 v1(40.513,64.389) ; v1(72.669,74.066) 72.671,74.065 U105.2@75.566,74.065 ; Q105.5@91.615,73.975 92.852,73.975 v1(96.291,70.536) ; C112.2@30.734,70.419 C112.2@30.8,70.485 ; C112.2@30.734,70.419 C112.2@30.734,70.551 C112.2@30.8,70.485
  Bottom Layer w1: v1@28.829,68.453 28.89,68.514 C114.2@30.226,68.514
  other v1: 28.852,68.524 99.083,69.718 99.591,70.734 99.591,71.75 99.591,72.766 99.591,73.782 99.591,74.798 99.591,75.814 99.591,76.83 99.591,77.846 99.083,78.735 98.321,79.497
AFSK: R12.2 U2.31 | length 8.8
  Top Layer w0.3: U2.31@104.242,61.214 105.029,62 105.029,62.738 104.648,63.119
  Top Layer w0.5: 104.648,63.119 104.267,63.5 104.267,66.929 105.029,67.691 105.029,69.082 R12.2@105.018,69.093
ANTON: Q8.1 U1.13 | length 15.7
  Top Layer w0.4: Q8.1@82.634,89.22 85.283,89.22 86.106,90.043 86.106,91.694 85.852,91.948 84.455,91.948 83.947,92.456 83.947,98.298 84.285,98.636 U1.13@85.755,98.636
ASSERTLED: U2.58
AUDIOIN: C25.2 D10.3 L4.1 | length 13.2
  Top Layer w0.5: v1(69.875,46.355) 70.891,45.339 74.371,45.339 74.803,45.771 74.803,46.33 75.463,46.99 C25.2@78.425,46.99
  Bottom Layer w0.5: L4.1@69.469,45.086 69.469,46.126 69.698,46.355 v1(69.875,46.355) 69.875,46.451 70.688,47.264 D10.3@71.12,47.264
B_GND: Bat1.2 C112.1 C113.1 Q102.3 R106.1 U103.2 | length 4.2
  Top Layer w0.5: Bat1.2@29.6,72.034 Bat1.2@29.6,74.625
  Bottom Layer w0.5: C112.1@30.375,72.81 30.632,73.067 30.632,74.234 R106.1@30.734,74.234
  other v1: 37.107,67.178 38.123,67.178 38.123,68.321 28.471,71.623 28.471,72.512 28.471,73.528 28.471,74.544 28.471,75.56 28.448,76.581 28.471,77.592 30.503,77.592 28.725,78.481 30.503,78.481 29.614,78.735
BUSY_IN: C25.1 R44.2 R45.1 U2.12 | length 57.9
  Top Layer w0.3: v1(90.17,46.736) 90.805,47.371 95.504,47.371 96.139,46.736 96.139,44.958 98.938,42.159 v1(100.607,42.159) ; U2.12@107.778,52.304 108.647,51.435 109.474,51.435 111.252,53.213 114.427,53.213 115.406,54.192 R45.1@115.533,54.192 ; 113.284,53.213 113.307,53.236 v1(113.307,54.224)
  Top Layer w0.4: v1@80.033,48.509 80.325,48.217 C25.1@80.325,46.99
  Top Layer w0.5: R45.1@115.533,54.192 R44.2@116.93,52.795
  Bottom Layer w0.3: v1(79.906,48.636) 79.906,47.475 80.635,46.746 90.16,46.746 v1(90.17,46.736) ; v1@100.584,42.291 100.584,43.442 109.466,52.324 110.109,52.324 111.237,53.452 111.78,53.452 112.552,54.224 v1(113.307,54.224)
CARRIERD_LED: R21.1 U2.44 | length 31.4
  Top Layer w0.3: v1(94.638,58.923) 94.638,58.928 96.204,58.928 U2.44@97.454,57.678
  Top Layer w0.5: v1(85.81,58.174) 85.336,57.7 85.336,41.743 86.614,40.465 R21.1@86.614,39.939
  Bottom Layer w0.5: v1(85.81,58.174) 86.505,58.869 94.583,58.869 v1(94.638,58.923)
CD_LED: D9.3 L5.1 LED1.4u R21.2 | length 50.6
  Top Layer w0.5: v1(73.762,46.99) 75.463,48.692 77.648,48.692 78.74,49.784 80.645,49.784 81.661,48.768 v1(81.661,48.641) ; LED1.4u@85.946,34.735 87.11,34.735 88.138,35.763 88.138,38.039 v1@87.899,38.039 ; R21.2@86.614,38.039 v1@87.899,38.039 ; v1(88.174,38.314) v1@87.899,38.039
  Bottom Layer w0.5: D9.3@73.7,48.707 73.7,46.442 73.762,46.38 ; v1(73.762,46.99) 73.762,46.38 ; v1@81.684,48.641 v1(81.661,48.641) 86.487,48.641 87.122,48.006 92.837,48.006 95.631,45.212 95.631,44.069 94.996,43.434 89.457,43.434 88.174,42.151 v1(88.174,38.314) ; 73.762,46.38 73.762,45.086 L5.1@73.787,45.086 73.787,46.355 73.762,46.38
EN_3V3BAT: Q103.3 R109.1 U104.4 | length 3.9
  Bottom Layer w0.5: Q103.3@42.799,69.299 42.799,69.596 43.434,70.231 43.434,71.059 R109.1@43.495,71.12 43.561,71.186 U104.4@45.225,71.186
EXT.SUPPLY: C40.1 R42.1 R43.2 U2.21 | length 122.6
  Top Layer w0.3: U2.21@107.778,57.678 110.933,60.833 111.633,60.833 112.141,61.341
  Top Layer w0.4: R43.2@44.323,31.054 44.323,29.972 46.609,27.686 73.279,27.686 74.676,26.289 81.407,26.289 81.661,26.035 91.821,26.035 92.329,26.543 97.155,26.543 97.155,26.563 98.378,27.786 98.378,29.417 100.711,31.75 108.966,31.75 111.379,34.163 111.379,36.721 v1(109.37,38.73) ; v1(109.37,41.143) 111.025,42.799 112.776,42.799 119.213,49.236 119.213,52.16 119.888,52.835 119.888,58.039 117.729,60.198 117.094,60.198 116.652,60.64 C40.1@116.652,61.722 ; 112.141,61.341 113.538,62.738 115.062,62.738
  Top Layer w0.8: 115.062,62.738 116.652,62.738 ; C40.1@116.652,61.722 116.652,62.738 ; R42.1@116.652,63.759 116.652,62.738
  Bottom Layer w0.4: v1@109.347,41.148 109.37,41.125 v1(109.37,38.73)